# EAGLE board plugV6-Relay-NC-3 (EAGLE 7.5.0)
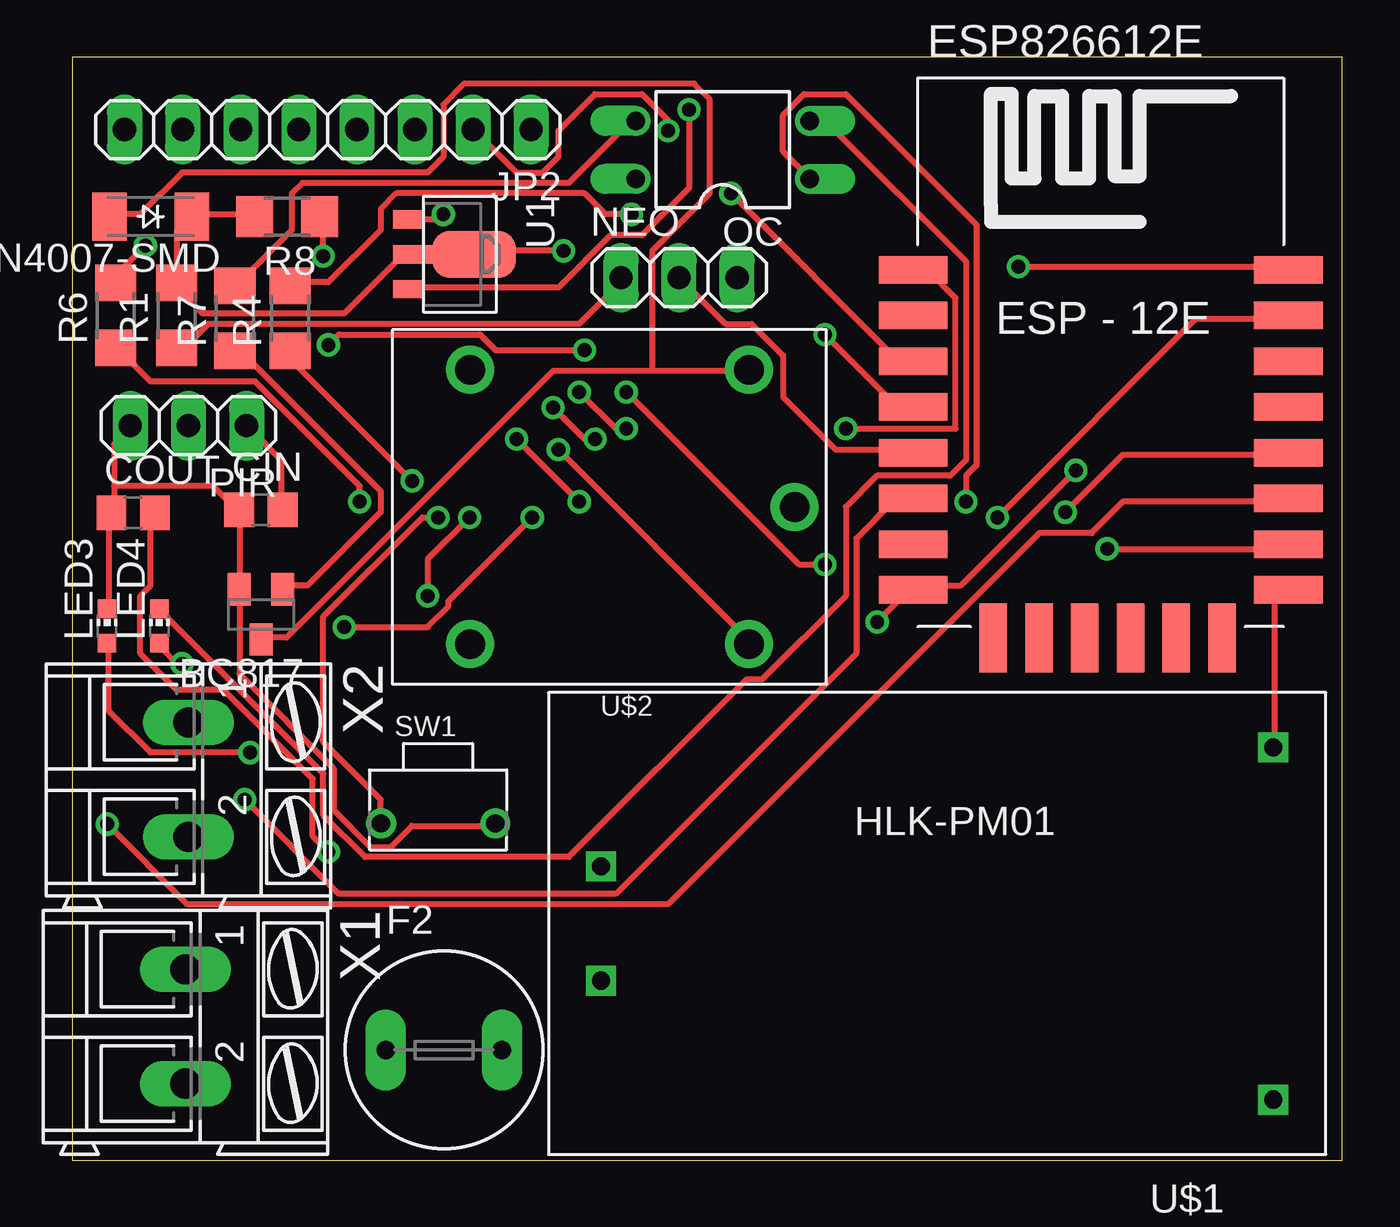
[diagram p0: board, top side]
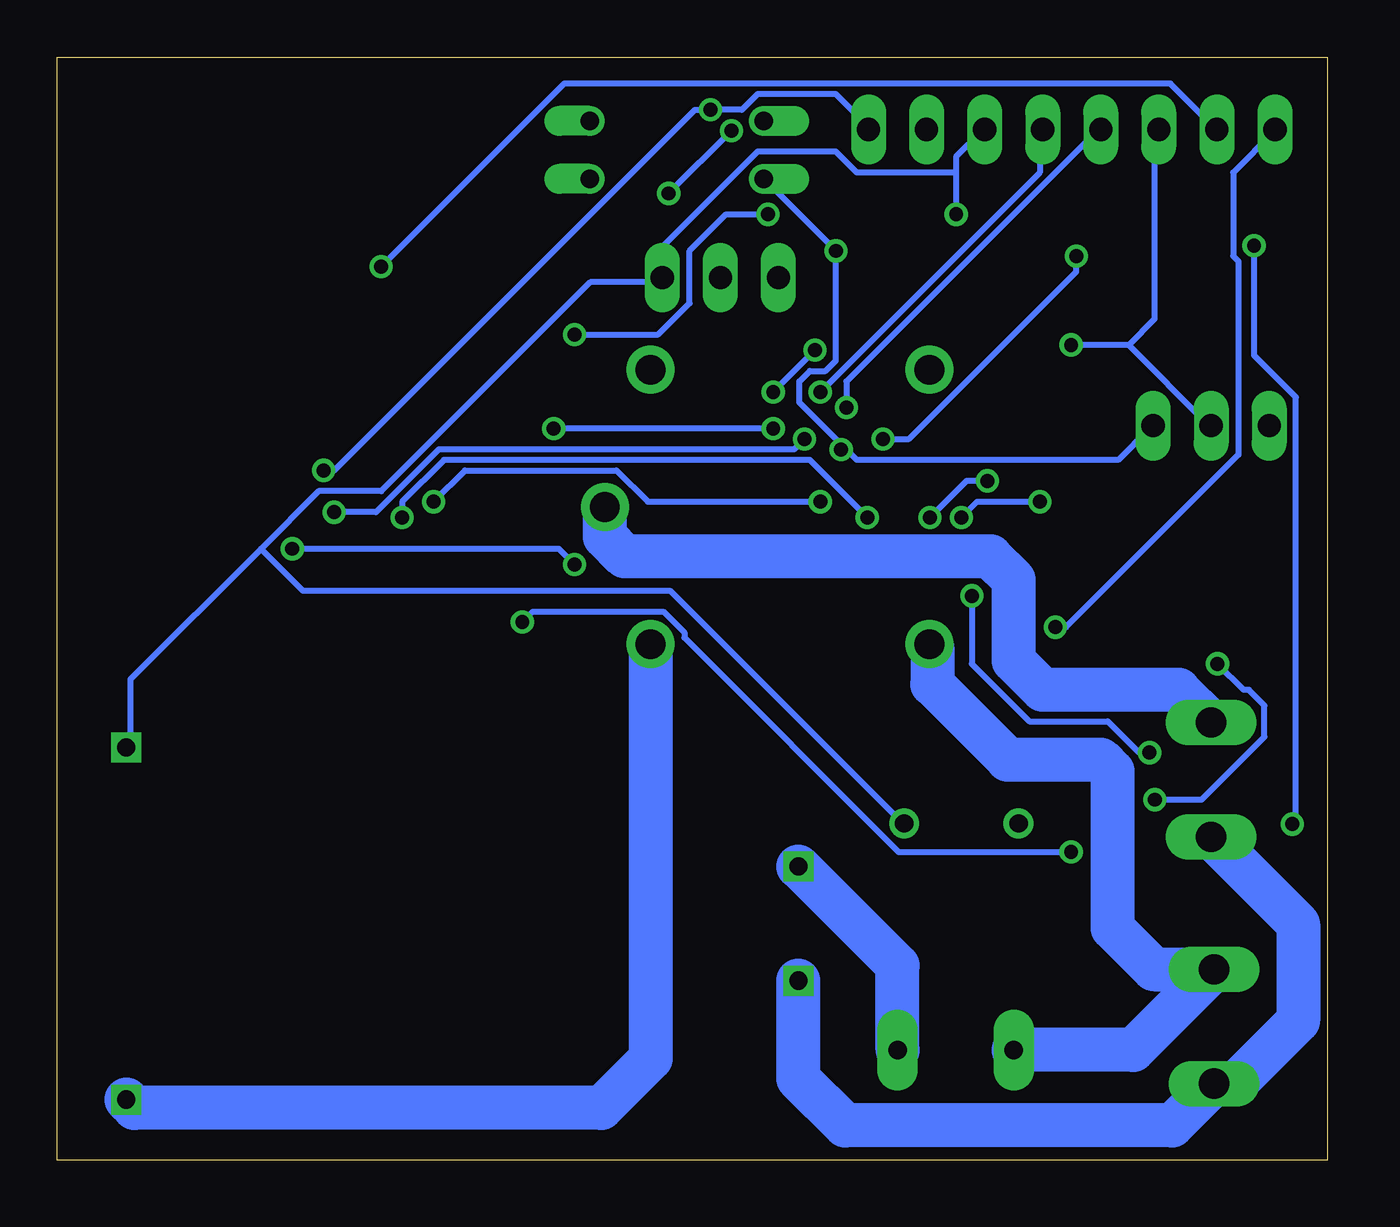
[diagram p1: board, bottom side, seen from below]

Size 55.55 x 48.25 mm. Coordinates in mm from the lower left corner, seen from the top.
Outline: 0,0 55.55,0 55.55,48.25 0,48.25 0,0
Copper layers (1*16): Top 0.035mm / dielectric 1.5mm / Bottom 0.035mm
Design rules "default": minimum track width 10mil, minimum drill 24mil, track to track 8mil, track to pad 8mil, pad to pad 8mil, via to via 8mil, smd to smd 8mil, copper to edge 40mil, drill to drill 8mil, minimum pad ring 10mil, minimum via ring 8mil, stop-mask expansion 4mil, vias tented up to drill 0mil, thermal gap 10mil

## Footprints (pad centres in the part's own frame; a part is rotated, then mirrored left to right if it is on the bottom)
SOD-123_MINI-SMA = smd 1.5 x 2.1: A 1.8,0; C -1.8,0
SOT23-BEC = smd 1 x 1.4: B -0.95,-1.1; C 0,1.1; E 0.95,-1.1
C0805 = smd 1.3 x 1.5: 1 -0.95,0; 2 0.95,0
ESP12E-SMD = smd 3 x 1.2: ADC -8.3,3.8; CH_PD -8.3,1.8; GND 8.1,-8.2; GPIO0 8.1,-2.2; GPIO2 8.1,-4.2; GPIO4 8.1,-0.2; GPIO5 8.1,1.8; GPIO12 -8.3,-4.2; GPIO13 -8.3,-6.2; GPIO14 -8.3,-2.2; GPIO15 8.1,-6.2; GPIO16 -8.3,-0.2; RESET -8.3,5.8; RXD0 8.1,3.8; TXD0 8.1,5.8; VCC -8.3,-8.2 | smd 1.2 x 3: CS0 -4.8,-10.3; GPIO9 -0.8,-10.3; GPIO10 1.2,-10.3; MISO -2.8,-10.3; MOSI 3.2,-10.3; SCLK 5.2,-10.3
TR5 = drill 0.813 pad 1.778 long: 1 -2.54,0; 2 2.54,0
1X08 = drill 1.016 long: 1 -8.89,0; 2 -6.35,0; 3 -3.81,0; 4 -1.27,0; 5 1.27,0; 6 3.81,0; 7 6.35,0; 8 8.89,0
CHIP-LED0603 = smd 0.8 x 0.8: A 0,-0.75; C 0,0.75
1X03 = drill 1.016 long: 1 -2.54,0; 2 0,0; 3 2.54,0
DIL04 = drill 0.813 offset: 1 -1.27,-3.81; 2 1.27,-3.81; 3 1.27,3.81; 4 -1.27,3.81
R1206 = smd 1.6 x 1.803: 1 -1.422,0; 2 1.422,0
SW2-5.0-6.0X3.0X4.3MM = drill 0.8 pad 1.27: 1 -2.5,0; 2 2.5,0
SOT89 = smd 0.8 x 1.4: 1 -1.524,-1.905; 3 1.524,-1.905 | smd 0.8 x 1.9: 2 0,-1.651 | smd 2.032 x 3.65: 4 0,0.94
HLK-PM01 = drill 0.8 square: +5V 15.19,-7.76; AC1 -14.21,2.44; AC2 -14.21,-2.56; GND 15.19,7.64
RELAY-SONGLE = drill 1.3 pad 2.1: COM -8.1,0; NC 6.1,6; NO 6.1,-6; V+ -6.1,6; V- -6.1,-6
AK300/2 = drill 1.321 long: 1 -2.515,0; 2 2.489,0

## Placement (x,y rotation side)
1N4007-SMD  CGRM4007-G  [SOD-123_MINI-SMA]  3.43,41.27 180 top
BC817  SOT23  [SOT23-BEC]  8.26,23.88 180 top
CIN  1uF  [C0805]  8.26,28.45 0 top
COUT  1uF  [C0805]  2.67,28.32 0 top
ESP826612E  Value  [ESP12E-SMD]  45.09,33.15 0 top
F2  [TR5]  16.26,4.83 0 top
JP2  Interface PIN  [1X08]  11.18,45.09 180 top
LED3  0805  [CHIP-LED0603]  1.52,23.37 0 top
LED4  0805-relay  [CHIP-LED0603]  3.81,23.37 0 top
NEO  [1X03]  26.54,38.61 0 top
OC  PC817  [DIL04]  28.45,44.2 90 top
PIR  [1X03]  5.08,32.13 180 top
R1  230  [R1206]  4.57,36.96 90 top
R4  230  [R1206]  9.53,36.83 90 top
R6  470  [R1206]  1.91,36.96 90 top
R7  470  [R1206]  7.11,36.83 90 top
R8  1K  [R1206]  9.4,41.27 180 top
SW1  [SW2-5.0-6.0X3.0X4.3MM]  16,14.73 0 top
U1  XC6206PR  [SOT89]  16.64,39.62 270 top
U$1  HLK-PM01  [HLK-PM01]  37.34,10.41 0 top
U$2  RELAY-SONGLE  [RELAY-SONGLE]  23.5,28.57 180 top
X1  220V  [AK300/2]  4.95,5.84 270 top
X2  Plug  [AK300/2]  5.08,16.64 270 top

## Library data of the parts
1N4007-SMD = diode
BC817 = transistor-neu-to92
CIN COUT R1 R4 R6-R8 = rcl
ESP826612E = esp8266modules
F2 = fuse; OC_FARNELL: unknown; OC_NEWARK: unknown
JP2 NEO PIR = pinhead
LED3 LED4 = led
OC = optocoupler; MPN: PC817X4J000F; OC_FARNELL: 9707727; OC_NEWARK: 97K7059
SW1 = Seeed-OPL-Switch
U1 = IC
U$1 = HLK-PM01
U$2 = Seeed-OPL-Relay
X1 X2 = con-ptr500; OC_FARNELL: unknown; OC_NEWARK: unknown

## Nets
+5V: 1N4007-SMD.C CIN.2 OC.4 PIR.1 R1.2 R8.2 U1.2 U1.4 U$1.+5V U$2.V+
EN: ESP826612E.CH_PD JP2.2
GND: BC817.E CIN.1 COUT.1 ESP826612E.GND JP2.3 LED3.C NEO.3 PIR.3 SW1.2 U1.1 U$1.GND
GPIO0: ESP826612E.GPIO0 JP2.5
GPIO2: ESP826612E.GPIO2 R6.2
GPIO12: ESP826612E.GPIO12 LED4.A
GPIO13: ESP826612E.GPIO13
GPIO14: ESP826612E.GPIO14 NEO.2
GPIO15: ESP826612E.GPIO15 JP2.6 PIR.2
GPIO16: ESP826612E.GPIO16 R4.2
N$1: F2.1 U$2.NC X1.1
N$2: F2.2 U$1.AC1
N$3: U$1.AC2 X1.2 X2.2
N$4: U$2.COM X2.1
N$5: OC.3 R7.2
N$6: BC817.B R7.1
N$7: R6.1 SW1.1
N$8: LED3.A R4.1
N$9: NEO.1 R1.1
N$13: OC.1 R8.1
N$15: LED4.C OC.2
N$18: 1N4007-SMD.A BC817.C U$2.V-
RST: ESP826612E.RESET JP2.4
RX: ESP826612E.RXD0 JP2.8
TX: ESP826612E.TXD0 JP2.7
V33: COUT.2 ESP826612E.VCC JP2.1 U1.3

## Tracks (layer width: path | path; a pad name or v marks a point on that pad's centre or on a via)
+5V  (via drill 0.61)
  Top 0.254: R8.2 7.77,41.38 5.26,41.38 1N4007-SMD.C 5.03,41.15 4.57,40.69 R1.2 4.57,38.18 5.71,37.03 11.89,37.03 14.4,39.55 14.86,39.55 U1.2 15.09,39.78 17.37,39.78 U1.4 17.6,39.78 v21.49,39.78 | CIN.2 9.14,28.57 9.14,30.63 7.77,32 PIR.1 | v21.26,31.09 29.72,22.63 U$2.V+
  Bottom 0.254: OC.4 v21.49,39.78 21.49,34.98 21.95,34.52 22.63,34.52 23.09,34.06 23.09,33.15 21.26,31.32 | 21.26,31.32 20.57,30.63 9.14,30.63 7.77,32 PIR.1 | v21.26,31.09 21.26,31.32
  Bottom 1.93: U$2.V+ 29.59,4.44 31.75,2.29 52.16,2.29 U$1.+5V
EN  (via drill 0.61)
  Top 0.254: v28.8,42.29 36.12,34.98 36.58,34.98 ESP826612E.CH_PD | v26.06,45.03 26.06,45.49 24.92,46.63 22.86,46.63 21.26,45.03 21.26,43.89 20.57,43.2 19.43,43.2 17.6,45.03 JP2.2
  Bottom 0.254: v26.06,45.03 v28.8,42.29
GND  (via drill 0.61)
  Top 0.254: LED3.C 1.6,24.23 1.6,28.12 COUT.1 1.83,28.35 1.83,29.49 | 1.83,29.49 1.83,31.32 2.52,32 PIR.3 | SW1.2 18.29,14.63 14.86,14.63 13.95,13.72 13.03,13.72 11.43,15.32 11.43,17.14 7.32,21.26 7.32,24.92 BC817.E 7.32,25.15 7.32,28.35 CIN.1 7.09,28.57 6.17,29.49 1.83,29.49 | U$1.GND 52.58,18.06 52.58,24.46 53.03,24.92 ESP826612E.GND | U1.1 16,41.15 v16.23,41.38
  Bottom 0.254: 16.23,43.2 16.23,43.89 15.09,45.03 JP2.3 | 16.23,43.2 v16.23,41.38 | 16.23,43.2 20.57,43.2 21.49,44.12 24.92,44.12 29.03,40.01 29.03,38.63 NEO.3 29.26,38.41 32.23,38.41 41.38,29.26 44.12,29.26 46.63,26.75 | 46.63,26.75 52.35,21.03 52.35,18.06 U$1.GND | 46.63,26.75 44.81,24.92 28.75,24.92 18.69,14.86 18.52,14.86 SW1.2
GPIO0  (via drill 0.61)
  Top 0.254: v43.43,28.35 45.95,30.86 53.03,30.86 ESP826612E.GPIO0 | v22.86,31.55 22.4,31.55 v21.03,32.92
  Bottom 0.254: v43.43,28.35 41.6,28.35 38.86,31.09 23.32,31.09 v22.86,31.55 | v21.03,32.92 21.03,34.06 10.06,45.03 JP2.5
GPIO2  (via drill 0.61)
  Top 0.254: v3.2,40.01 2.06,38.86 2.06,38.41 R6.2 | v1.52,14.71 5.03,11.2 26.06,11.2 42.29,27.43 44.58,27.43 45.95,28.8 53.03,28.8 ESP826612E.GPIO2
  Bottom 0.254: v3.2,40.01 3.2,35.2 1.37,33.38 1.37,14.86 v1.52,14.71
GPIO12  (via drill 0.61)
  Top 0.254: v4.8,21.72 4.57,21.72 3.89,22.4 LED4.A | v7.54,15.77 11.66,11.66 23.77,11.66 34.29,22.17 34.29,27.2 35.89,28.8 36.58,28.8 ESP826612E.GPIO12
  Bottom 0.254: v4.8,21.72 3.66,20.57 3.43,20.57 2.74,19.89 2.74,18.52 5.49,15.77 v7.54,15.77
GPIO14
  Top 0.254: NEO.2 28.57,36.58 29.72,36.58 31.09,35.2 31.09,33.38 33.38,31.09 36.58,31.09 ESP826612E.GPIO14
GPIO15  (via drill 0.61)
  Top 0.254: v45.26,26.75 53.03,26.75 ESP826612E.GPIO15 | v32.92,26.06 31.77,26.06 v24.23,33.6 | v22.4,35.43 18.52,35.43 17.83,36.12 11.66,36.12 v11.2,35.66
  Bottom 0.254: v45.26,26.75 33.6,26.75 v32.92,26.06 | v22.4,35.43 v24.23,33.6 | 8.69,35.66 v11.2,35.66 | 8.69,35.66 5.26,32.23 PIR.2 | 8.69,35.66 7.54,36.8 7.54,45.03 JP2.6
GPIO16  (via drill 0.61)
  Top 0.254: v24.46,41.38 23.32,41.38 22.4,42.29 14.17,42.29 13.49,41.6 13.49,40.69 11.2,38.41 9.6,38.41 R4.2 | v32.92,36.12 35.89,33.15 36.58,33.15 ESP826612E.GPIO16
  Bottom 0.254: v24.46,41.38 26.29,41.38 27.89,39.78 27.89,37.49 29.26,36.12 v32.92,36.12
N$1
  Bottom 1.93: U$2.NC 17.27,22.45 17.27,20.83 13.97,17.53 9.91,17.53 9.4,17.02 9.4,10.16 7.59,8.36 X1.1 8.48,4.83 F2.1
N$2
  Bottom 1.93: F2.2 18.8,8.52 U$1.AC1
N$3
  Bottom 1.93: X2.2 1.27,10.34 1.27,6.1 4.01,3.35 X1.2 6.78,1.52 21.08,1.52 23.13,3.57 U$1.AC2
N$4
  Bottom 1.93: X2.1 6.5,20.57 12.45,20.57 13.72,21.84 13.72,25.4 14.73,26.42 30.73,26.42 31.59,27.28 U$2.COM
N$5
  Top 0.254: R7.2 7.32,38.41 9.6,40.69 9.6,42.29 10.06,42.75 21.72,42.75 24.46,45.49 OC.3
N$6
  Top 0.254: BC817.B 9.37,25.15 10.29,25.15 13.49,28.35 13.49,29.26 7.32,35.43 R7.1
N$7  (via drill 0.61)
  Top 0.254: v12.57,28.8 12.57,29.49 8,34.06 3.43,34.06 2.06,35.43 R6.1 | v16,28.12 15.32,28.12 10.97,23.77 10.97,18.29 13.49,15.77 13.49,14.86 SW1.1
  Bottom 0.254: v12.57,28.8 15.32,28.8 v16,28.12
N$8  (via drill 0.61)
  Top 0.254: v7.77,17.83 3.43,17.83 1.6,19.66 1.6,22.4 LED3.A | v15.54,24.69 15.54,26.29 v17.37,28.12 | v14.86,29.72 9.37,35.2 R4.1
  Bottom 0.254: v7.77,17.83 8.23,17.83 9.6,19.2 13.03,19.2 15.54,21.72 v15.54,24.69 | v17.37,28.12 15.77,29.72 v14.86,29.72
N$9
  Top 0.254: R1.1 4.57,35.66 5.03,35.66 5.94,36.58 22.17,36.58 24,38.41 NEO.1
N$13  (via drill 0.61)
  Top 0.254: v10.97,39.55 10.97,41.15 R8.1 | v22.17,28.8 v19.43,31.55 | v39.09,28.8 39.09,29.95 39.55,30.4 39.55,40.92 33.83,46.63 32,46.63 31.09,45.72 31.09,44.12 32.23,42.98 OC.1
  Bottom 0.254: v10.97,39.55 10.97,38.86 18.29,31.55 v19.43,31.55 | v22.17,28.8 29.72,28.8 31.09,30.18 37.72,30.18 v39.09,28.8
N$15
  Top 0.254: LED4.C 3.89,24 10.97,16.92 10.97,15.09 12.8,13.26 21.72,13.26 29.49,21.03 30.18,21.03 33.83,24.69 33.83,28.57 35.2,29.95 38.41,29.95 39.09,30.63 39.09,39.32 33.15,45.26 32.46,45.26 OC.2
N$18
  Top 0.254: 25.38,34.52 29.49,34.52 U$2.V- | 25.38,34.52 21.03,34.52 9.37,22.86 8.46,22.86 BC817.C | 25.38,34.52 25.38,39.78 27.89,42.29 27.89,46.41 27.2,47.09 17.14,47.09 16.23,46.18 16.23,43.89 15.54,43.2 4.8,43.2 2.97,41.38 1.83,41.38 1N4007-SMD.A
RST  (via drill 0.61)
  Top 0.254: v33.83,32 38.63,32 38.63,37.72 37.49,38.86 36.8,38.86 ESP826612E.RESET | v24.23,32 23.77,32 v22.17,33.6
  Bottom 0.254: v24.23,32 v33.83,32 | v22.17,33.6 12.57,43.2 12.57,45.03 JP2.4
RX  (via drill 0.61)
  Top 0.254: v40.46,28.12 49.15,36.8 53.03,36.8 ESP826612E.RXD0 | v20.12,28.12 16.46,24.46 16.46,24.23 15.54,23.32 v11.89,23.32
  Bottom 0.254: v40.46,28.12 40.46,28.8 38.63,30.63 22.63,30.63 v20.12,28.12 | v11.89,23.32 11.43,23.32 3.89,30.86 3.89,39.32 4.12,39.55 4.12,43.2 2.29,45.03 JP2.8
TX  (via drill 0.61)
  Top 0.254: v41.38,39.09 53.03,39.09 ESP826612E.TXD0
  Bottom 0.254: v41.38,39.09 33.38,47.09 6.86,47.09 5.03,45.26 JP2.7
V33  (via drill 0.61)
  Top 0.254: v26.98,45.95 26.98,42.52 24.92,40.46 23.55,40.46 21.26,38.18 14.86,38.18 U1.3 | v11.2,13.49 10.52,14.17 10.52,16.69 6.63,20.57 4.57,20.57 2.97,22.17 2.97,24.69 3.43,25.15 3.43,28.12 COUT.2 | v35.2,23.55 36.58,24.92 ESP826612E.VCC 36.8,25.15 38.86,25.15 v43.89,30.18
  Bottom 0.254: JP2.1 20.12,45.26 21.49,46.63 24.92,46.63 25.6,45.95 v26.98,45.95 27.66,45.95 43.43,30.18 v43.89,30.18 | v11.2,13.49 18.75,13.49 28.12,22.86 28.12,23.09 29.03,24 34.75,24 v35.2,23.55